# EAGLE board board (EAGLE 7.2.0)
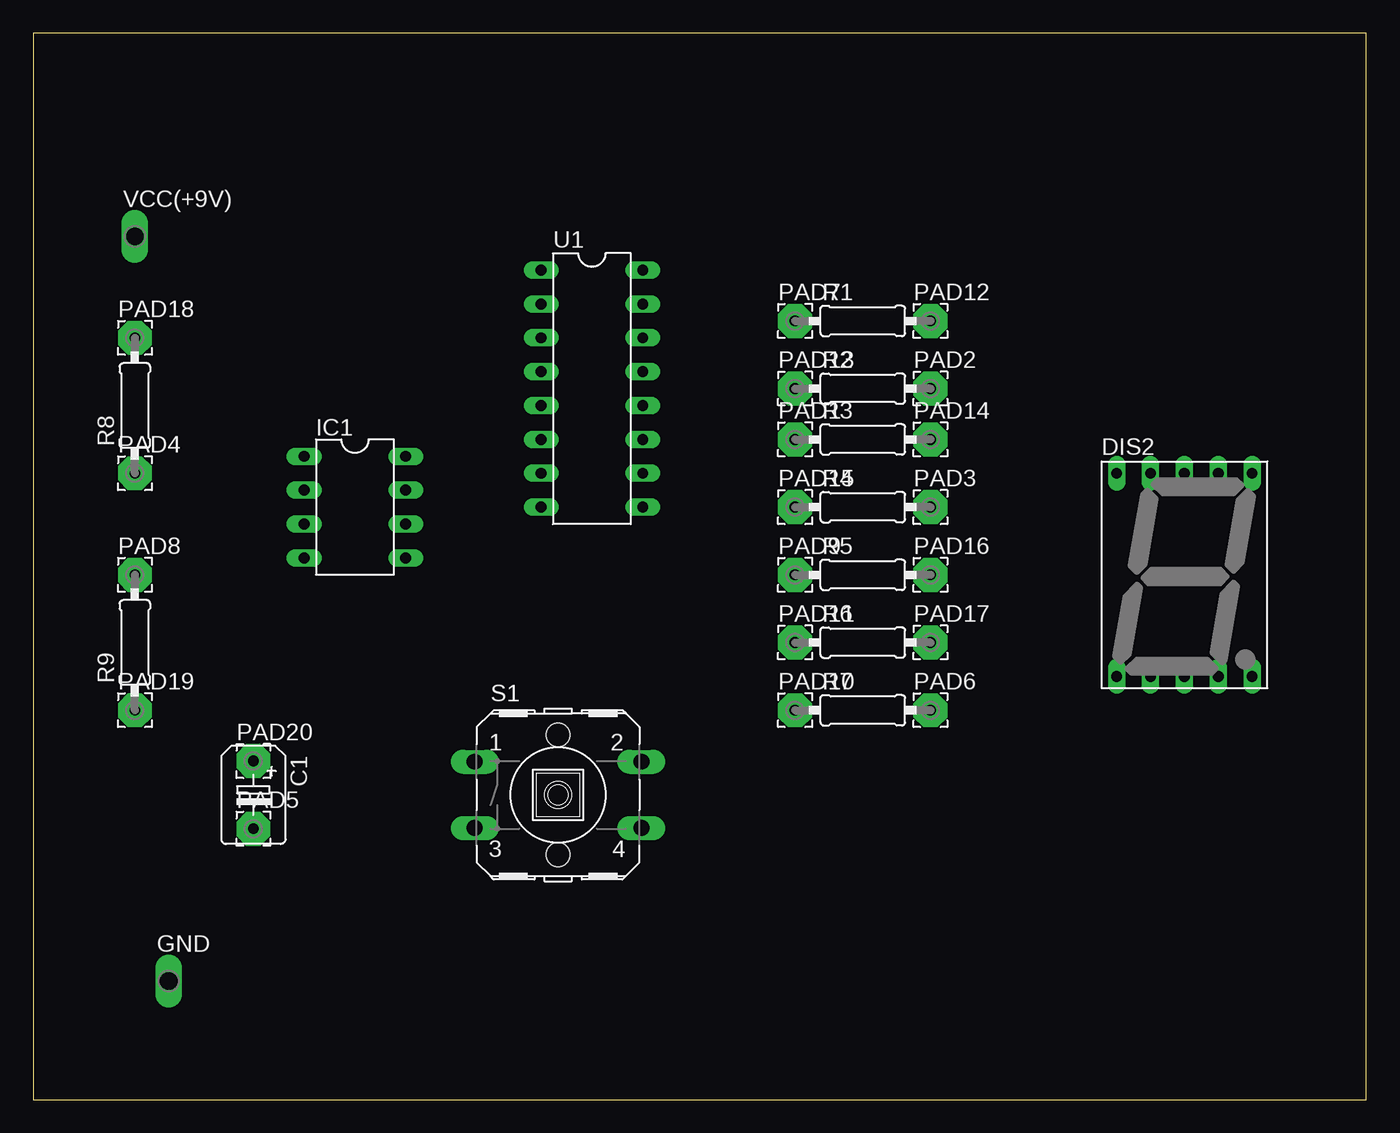
[diagram p0: board, top side]
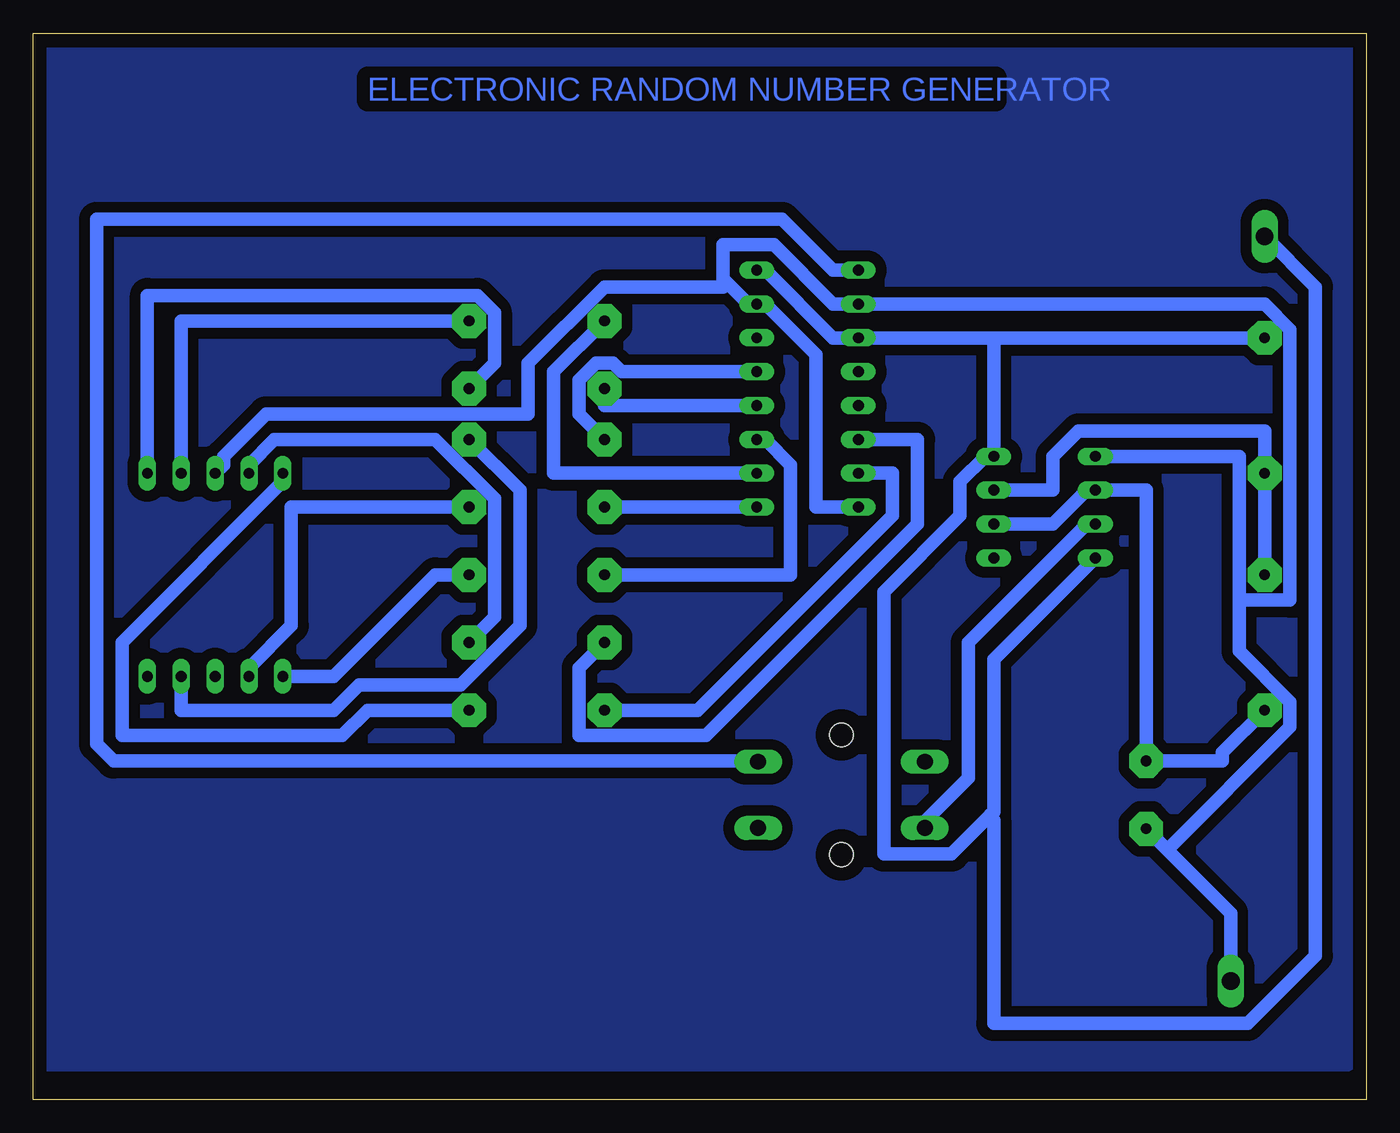
[diagram p1: board, bottom side, seen from below]

Size 100 x 80 mm. Coordinates in mm from the lower left corner, seen from the top.
Outline: 0,0 100,0 100,80 0,80 0,0
Copper layers (1*16): Top 0.035mm / dielectric 1.5mm / Bottom 0.035mm
Design rules "default *": minimum track width 40mil, minimum drill 24mil, track to track 20mil, track to pad 20mil, pad to pad 20mil, via to via 20mil, smd to smd 8mil, copper to edge 40mil, drill to drill 8mil, minimum pad ring 10mil, minimum via ring 8mil, stop-mask expansion 4mil, vias tented up to drill 0mil, thermal gap 10mil

## Footprints (pad centres in the part's own frame; a part is rotated, then mirrored left to right if it is on the bottom)
B45181B = drill 0.813: + -2.54,0 | drill 0.813 octagon: - 2.54,0
HDSP-M = drill 0.813 long: 1 -5.08,-7.62; 2 -2.54,-7.62; 3 0,-7.62; 4 2.54,-7.62; 5 5.08,-7.62; 6 5.08,7.62; 7 2.54,7.62; 8 0,7.62; 9 -2.54,7.62; 10 -5.08,7.62
P1-13Y = drill 1.321 pad 1.905 long: TP 0,0
DIL-08 = drill 0.813 long: 1 -3.81,-3.81; 2 -1.27,-3.81; 3 1.27,-3.81; 4 3.81,-3.81; 5 3.81,3.81; 6 1.27,3.81; 7 -1.27,3.81; 8 -3.81,3.81
2,54/0,8 = drill 0.813 pad 2.54 octagon: 1 0,0
0207/10 = drill 0.813 octagon: 1 -5.08,0; 2 5.08,0
B3F-40XX = drill 1.194 long: 1 -6.248,2.489; 2 6.248,2.489; 3 -6.248,-2.489; 4 6.248,-2.489 | hole 1.803: 0,-4.496; 0,4.496
DIL16 = drill 0.813 long: 1 -8.89,-3.81; 2 -6.35,-3.81; 3 -3.81,-3.81; 4 -1.27,-3.81; 5 1.27,-3.81; 6 3.81,-3.81; 7 6.35,-3.81; 8 8.89,-3.81; 9 8.89,3.81; 10 6.35,3.81; 11 3.81,3.81; 12 1.27,3.81; 13 -1.27,3.81; 14 -3.81,3.81; 15 -6.35,3.81; 16 -8.89,3.81

## Placement (x,y rotation side)
C1  10uf  [B45181B]  16.51,22.86 270 top
DIS2  HD-H103  [HDSP-M]  86.36,39.37 0 top
GND  TPPAD1-13Y  [P1-13Y]  10.16,8.89 0 top
IC1  NE555  [DIL-08]  24.13,44.45 270 top
PAD1  [2,54/0,8]  57.15,49.53 0 top
PAD2  [2,54/0,8]  67.31,53.34 0 top
PAD3  [2,54/0,8]  67.31,44.45 0 top
PAD4  [2,54/0,8]  7.62,46.99 0 top
PAD5  [2,54/0,8]  16.51,20.32 0 top
PAD6  [2,54/0,8]  67.31,29.21 0 top
PAD7  [2,54/0,8]  57.15,58.42 0 top
PAD8  [2,54/0,8]  7.62,39.37 0 top
PAD9  [2,54/0,8]  57.15,39.37 0 top
PAD10  [2,54/0,8]  57.15,29.21 0 top
PAD11  [2,54/0,8]  57.15,34.29 0 top
PAD12  [2,54/0,8]  67.31,58.42 0 top
PAD13  [2,54/0,8]  57.15,53.34 0 top
PAD14  [2,54/0,8]  67.31,49.53 0 top
PAD15  [2,54/0,8]  57.15,44.45 0 top
PAD16  [2,54/0,8]  67.31,39.37 0 top
PAD17  [2,54/0,8]  67.31,34.29 0 top
PAD18  [2,54/0,8]  7.62,57.15 0 top
PAD19  [2,54/0,8]  7.62,29.21 0 top
PAD20  [2,54/0,8]  16.51,25.4 0 top
R1  330 ohms  [0207/10]  62.23,58.42 0 top
R2  330 ohms  [0207/10]  62.23,53.34 0 top
R3  330 ohms  [0207/10]  62.23,49.53 0 top
R4  330 ohms  [0207/10]  62.23,44.45 0 top
R5  330 ohms  [0207/10]  62.23,39.37 0 top
R6  330 ohms  [0207/10]  62.23,34.29 0 top
R7  330 ohms  [0207/10]  62.23,29.21 0 top
R8  100 ohms  [0207/10]  7.62,52.07 90 top
R9  220 ohms  [0207/10]  7.62,34.29 90 top
S1  [B3F-40XX]  39.37,22.86 0 top
U1  BQ2054PN  [DIL16]  41.91,53.34 270 top
VCC(+9V)  TPPAD1-13Y  [P1-13Y]  7.62,64.77 0 top

## Library data of the parts
C1 R1-R9 = resistor
DIS2 = display-hp; OC_FARNELL: unknown; OC_NEWARK: unknown
GND VCC(+9V) = testpad
IC1 = st-microelectronics; MF: Arrow Electronics; MPN: NE555N; OC_FARNELL: 1467742; OC_NEWARK: 89K1486
PAD1-PAD20 = wirepad
S1 = switch-omron; MF: OMRON COMPONENTS USA; MPN: B3F-4000; OC_FARNELL: 176434; OC_NEWARK: 36K3105
U1 = texas; MF: TEXAS INSTRUMENT CONNECTORS; MPN: BQ2054PN; OC_FARNELL: 8407789; OC_NEWARK: 74C7582

## Nets
N$1: R1.1 U1.10
N$2: R2.1 U1.12
N$3: R3.1 U1.13
N$4: R4.1 U1.9
N$5: R5.1 U1.11
N$6: R6.1 U1.6
N$7: R7.1 U1.7
N$8: DIS2.7 R1.2
N$9: DIS2.6 R2.2
N$10: DIS2.4 R3.2
N$11: DIS2.2 R4.2
N$12: DIS2.1 R5.2
N$13: DIS2.9 R6.2
N$14: DIS2.10 R7.2
N$15: C1.- DIS2.8 GND.TP IC1.1 U1.2 U1.8 U1.15
N$16: IC1.4 IC1.8 R8.2 U1.3 U1.16 VCC(+9V).TP
N$17: IC1.7 R8.1 R9.2
N$18: C1.+ IC1.2 IC1.6 R9.1
N$19: IC1.3 S1.3
N$20: S1.2 U1.1

## Tracks (layer width: path | path; a pad name or v marks a point on that pad's centre or on a via)
N$1
  Bottom 1.016: U1.10 60.96,46.99 60.96,54.61 R1.1
N$2
  Bottom 1.016: U1.12 57.15,52.07 R2.1
N$3
  Bottom 1.016: U1.13 55.88,54.61 56.52,55.24 57.78,55.24 59.05,53.98 59.05,51.44 R3.1
N$4
  Bottom 1.016: R4.1 U1.9
N$5
  Bottom 1.016: R5.1 43.18,39.37 43.18,47.62 45.09,49.53 U1.11
N$6
  Bottom 1.016: U1.6 33.66,49.53 33.66,43.18 49.53,27.3 59.05,27.3 59.05,32.38 R6.1
N$7
  Bottom 1.016: U1.7 35.56,46.99 35.56,43.81 50.16,29.21 R7.1
N$8
  Bottom 1.016: R1.2 88.9,58.42 DIS2.7
N$9
  Bottom 1.016: R2.2 65.41,55.24 65.41,59.05 66.67,60.33 91.44,60.33 DIS2.6
N$10
  Bottom 1.016: R3.2 63.5,45.72 63.5,35.56 67.94,31.11 75.56,31.11 77.47,29.21 88.9,29.21 DIS2.4
N$11
  Bottom 1.016: R4.2 80.64,44.45 80.64,35.56 83.82,32.38 DIS2.2
N$12
  Bottom 1.016: R5.2 69.85,39.37 77.47,31.75 DIS2.1
N$13
  Bottom 1.016: R6.2 65.41,36.2 65.41,45.09 69.85,49.53 81.92,49.53 83.82,47.62 DIS2.9
N$14
  Bottom 1.016: R7.2 74.93,29.21 76.83,27.3 93.34,27.3 93.34,34.29 81.28,46.35 DIS2.10
N$15
  Bottom 1.016: 14.92,18.73 10.16,13.97 GND.TP | 14.92,18.73 C1.- | IC1.1 9.53,48.26 9.53,37.47 | 9.53,37.47 9.53,33.66 5.71,29.84 5.71,27.94 14.92,18.73 | U1.8 41.27,44.45 41.27,55.88 45.09,59.69 U1.15 46.35,59.69 47.94,61.28 | 47.94,61.28 48.26,61.59 48.26,64.14 44.45,64.14 40.01,59.69 U1.2 7.62,59.69 5.71,57.78 5.71,37.47 9.53,37.47 | DIS2.8 85.72,47.62 85.72,48.26 82.55,51.44 62.87,51.44 62.87,55.24 57.15,60.96 48.26,60.96 47.94,61.28
N$16
  Bottom 1.016: IC1.4 27.94,33.02 27.94,21.59 28.26,21.27 | 28.26,21.27 31.11,18.41 36.2,18.41 36.2,38.1 30.48,43.81 30.48,46.35 28.57,48.26 IC1.8 27.94,57.15 | 27.94,57.15 R8.2 | 27.94,57.15 U1.3 40.01,57.15 45.09,62.23 U1.16 | VCC(+9V).TP 3.81,60.96 3.81,10.79 8.89,5.71 27.94,5.71 27.94,20.95 28.26,21.27
N$17
  Bottom 1.016: R9.2 R8.1 7.62,50.16 21.59,50.16 23.5,48.26 23.5,45.72 IC1.7
N$18
  Bottom 1.016: IC1.6 23.5,43.18 20.95,45.72 IC1.2 16.51,45.72 C1.+ 10.79,25.4 10.79,26.04 R9.1
N$19
  Bottom 1.016: IC1.3 20.95,43.18 29.84,34.29 29.84,24.13 33.02,20.95 S1.3
N$20
  Bottom 1.016: U1.1 40.01,62.23 43.81,66.04 95.25,66.04 95.25,26.67 93.98,25.4 45.72,25.4 S1.2
S$1
  pour Bottom (isolate 0.813): 1.27,78.74 99.06,78.74 99.06,2.54 1.27,2.54

## Text on the board
Bottom: ELECTRONIC RANDOM NUMBER GENERATOR